# Altium PCB qav90_sharp_ref.PcbDoc (part 2 of 3)
Units mm, origin at the board's own origin, x right, y up, seen from the top; angles counter-clockwise.
Board outline 125.43 x 101.14 mm, 3 copper layers (Top Layer, Mid-Layer 1, Bottom Layer); 90 components, 77 nets, 313 pads, 238 vias.
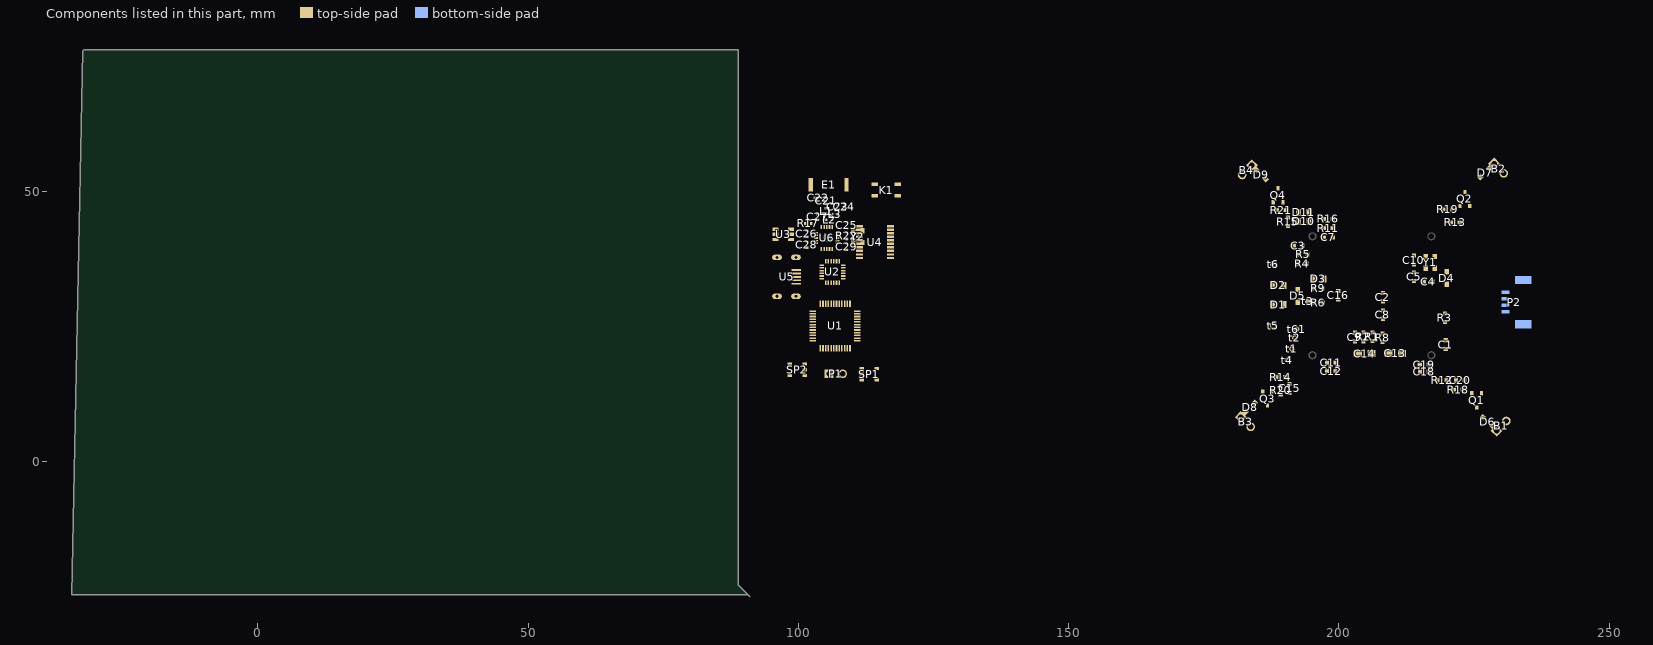
[diagram p2: the components of this part, seen from the top]

## Via types
v1: diameter 0.55, hole 0.25, Top Layer to Bottom Layer, tented both sides, 216 vias
v2: diameter 1.2, hole 1, Top Layer to Bottom Layer, 13 vias
v3: diameter 0.55, hole 0.25, Top Layer to Bottom Layer, 6 vias
v4: diameter 0.6, hole 0.6, Top Layer to Bottom Layer, tented both sides, 2 vias
v5: diameter 0.605, hole 0.3, Top Layer to Bottom Layer, tented both sides, 1 vias

## Nets (pads, with @x,y where several pads share a name; then routed paths per layer and width w, separated by ;. In a path a pad name is that pad's centre, name@x,y a point inside that pad or via, vN(x,y) a via of type N, cw(c..) or ccw(c..) an arc to the next point about the centre after c; other vN are vias at no path point) (continued)
copper on no net: | length 1779.4
  Top Layer w0.178: 111.377,38.067 ccw(c111.029,38.422) 111.526,38.422 ; 111.526,37.914 111.526,38.422 ; 111.676,38.067 cw(c112.024,38.422) 111.526,38.422 ; 112.335,37.969 ccw(c111.956,38.348) 112.492,38.348 ; 112.492,38.226 ccw(c112.854,38.226) 112.598,37.969 ; 112.86,42.931 112.86,39.756 111.526,38.422 ; 191.575,15.948 192.802,15.948 193.15,16.296 193.15,18.201 193.632,18.683 195.766,18.683 196.604,19.522 196.604,20.233 196.795,20.423 198.7,20.423 199.398,21.122 199.398,22.849 ; 191.824,15.799 cw(c192.184,15.439) 192.184,15.948 cw(c192.184,16.458) 191.824,16.098 ; v1(197.849,22.519) 198.382,22.519 198.712,22.849 199.398,22.849 ; v1@197.98,22.387 cw(c198.298,22.069) 198.298,22.519 cw(c198.298,22.968) v1@197.98,22.65 ; v1(198.306,23.332) 198.179,23.332 198.361,23.514 200.516,23.514 ; v1@198.312,23.326 cw(c198.766,22.871) 198.766,23.514 ; v1@198.437,23.2 cw(c199.195,22.442) 199.195,23.514 ; 199.962,22.785 ccw(c199.772,22.596) 199.772,22.864 ccw(c199.772,23.132) 199.962,22.943 ; 199.962,23.435 ccw(c199.772,23.246) 199.772,23.514 ccw(c199.772,23.782) 199.962,23.593 ; 200.516,22.864 199.561,22.864 199.546,22.849 199.398,22.849 ; v1@211.692,34.025 211.692,35.041 212.39,35.739 212.39,38.965 213.343,39.918 218.36,39.918 219.592,38.686 219.592,37.809 v1(219.997,37.403) 219.997,35.256 219.87,35.129 ; 212.06,39.118 213.19,40.248 218.497,40.248 219.922,38.823 219.924,38.823 220.632,38.114 220.632,35.334 220.937,35.03 220.937,32.958 ; 219.716,35.521 ccw(c219.037,36.2) 219.997,36.2 ; v1@219.811,37.403 ccw(c219.362,37.403) 219.68,37.721 ccw(c219.997,38.039) v1@219.997,37.589 ; 219.842,35.395 ccw(c219.466,35.771) 219.997,35.771 ; v1@219.866,37.272 cw(c219.548,36.954) 219.997,36.954 cw(c220.447,36.954) v1@220.129,37.272 ; 219.87,32.769 220.06,32.958 220.937,32.958 ; 219.997,35.955 ccw(c220.611,35.955) 220.177,35.521 ; 220.051,32.825 cw(c220.373,32.504) 220.373,32.958 ; 220.177,32.699 cw(c220.802,32.075) 220.802,32.958 ; 220.177,33.161 ccw(c220.666,33.649) 220.666,32.958 ; v1@221.187,19.923 cw(c220.869,19.606) 221.318,19.606 cw(c221.767,19.606) v1@221.45,19.923 ; v1(221.318,20.055) 221.318,19.336 221.928,18.726 ; 221.343,32.958 ccw(c221.343,33.71) 221.875,33.178 ; 221.397,19.257 cw(c220.866,18.726) 221.617,18.726 ; 221.6,32.958 cw(c221.6,32.57) 221.875,32.844 ; 221.638,19.016 ccw(c221.828,19.205) 221.828,18.937 ; 221.801,32.958 220.937,32.958
  Top Layer w0.203: 191.829,23.001 191.966,22.864 194.766,22.864 ; 191.967,23.139 ccw(c192.632,23.804) 192.632,22.864 ; 192.111,22.72 cw(c192.459,22.371) 192.459,22.864 ; 192.111,23.283 ccw(c193.122,24.295) 193.122,22.864 ; 194.221,22.794 ccw(c194.053,22.626) 194.053,22.864 ccw(c194.053,23.102) 194.221,22.934 ; 194.51,46.241 cw(c194.559,45.272) 195.245,45.958 ; 194.521,46.038 cw(c194.59,44.655) 195.569,45.634 ; 194.521,46.165 195.038,46.165 ; 194.531,45.835 cw(c194.62,44.038) 195.893,45.31 ; 194.541,45.632 cw(c194.651,43.421) 196.217,44.986 ; 194.915,46.069 cw(c195.038,46.039) 195.038,46.165 ; 194.915,46.261 ccw(c195.038,46.291) 195.038,46.165 ; 197.069,44.789 ccw(c196.592,44.312) 196.592,44.986 ccw(c196.592,45.661) 197.069,45.184 ; 197.267,44.986 196.217,44.986 ; 213.655,30.792 213.655,32.468 213.19,32.933 213.19,34.025 213.444,34.279 214.308,34.279 214.714,34.685 214.714,36.311 214.461,36.564 ; 213.707,33.272 cw(c212.627,32.191) 214.155,32.191 ; 213.851,33.415 cw(c213.117,32.682) 214.155,32.682 ; 213.882,36.564 214.461,36.564 ; 213.905,33.545 ccw(c213.905,34.412) 214.517,33.799 ; 213.905,33.749 ccw(c213.905,35.106) 214.864,34.146 ; 213.994,33.559 cw(c213.608,33.172) 214.155,33.172 ; 214.101,36.39 cw(c214.461,36.103) 214.461,36.564 ; 214.101,36.738 ccw(c214.461,37.025) 214.461,36.564 ; 214.155,30.792 214.155,33.092 213.905,33.342 214.06,33.342 215.121,34.402 215.121,36.627 215.905,37.411 215.905,37.742 ; 214.655,30.792 214.655,32.649 215.347,33.342 215.705,33.342 216.483,34.12 217.126,34.12 217.705,34.699 217.705,35.342 ; 215.705,33.622 ccw(c215.705,34.296) 216.182,33.819 ccw(c216.659,33.342) 215.984,33.342 ; 215.831,37.711 cw(c215.652,37.532) 215.905,37.532 ; 215.905,37.393 cw(c216.145,37.393) 216.099,37.629 ; 217.531,35.511 cw(c217.11,35.091) 217.705,35.091 ; 217.705,34.912 cw(c218.551,34.912) 217.953,35.511 ; 195.038,46.165 196.217,44.986
  Top Layer w0.25: 101.341,46.296 v1(102.382,45.255) ; v1@102.232,45.255 ccw(c101.87,45.255) 102.126,45.511 ccw(c102.382,45.767) v1@102.382,45.405 ; 187.481,29.519 ccw(c186.827,30.173) 187.752,30.173 ccw(c188.677,30.173) 188.023,29.519 ; 187.481,32.254 cw(c186.827,31.601) 187.752,31.601 cw(c188.677,31.601) 188.023,32.254 ; 187.741,32.663 ccw(c187.806,33.345) 188.291,32.86 ; 187.752,29.122 187.752,32.652 188.082,32.652 189.042,33.611 ; 187.765,32.912 ccw(c187.871,34.031) 188.666,33.236 ; 187.788,33.16 ccw(c187.936,34.717) 189.042,33.611 ; 189.481,29.519 ccw(c188.827,30.173) 189.752,30.173 ccw(c190.677,30.173) 190.023,29.519 ; 189.752,29.122 189.752,30.729 190.178,31.155 191.778,31.155 191.807,31.126 193.374,31.126 193.992,31.743 193.992,33.161 194.281,33.451 194.281,34.496 194.646,34.861 196.745,34.861 197.408,35.524 198.458,35.524 198.865,35.93 198.865,38.876 198.582,39.159 197.986,39.159 ; 189.752,32.652 189.782,32.652 190.742,33.611 193.592,33.611 193.879,33.899 193.879,34.674 194.517,35.311 196.626,35.311 ; 190.051,15.43 cw(c190.051,14.812) 190.488,15.249 cw(c190.925,15.686) 190.307,15.686 ; 190.051,15.686 190.559,15.178 195.385,15.178 196.071,15.864 198.055,15.864 198.28,16.089 200.233,16.089 200.49,16.347 201.633,16.347 202.294,17.007 202.294,17.845 202.985,18.536 204.035,18.536 204.792,19.293 204.792,20.861 205.306,21.376 209.431,21.376 v1(209.792,21.736) ; 190.567,43.661 191.367,43.661 191.426,43.602 194.825,43.602 195.944,42.483 200.541,42.483 ; 190.748,43.48 cw(c191.185,43.043) 191.185,43.661 cw(c191.185,44.279) 190.748,43.842 ; 191.722,35.592 ccw(c190.642,36.673) 192.17,36.673 ; 192.149,36.019 ccw(c191.495,36.673) 192.42,36.673 ; 192.567,36.411 192.542,36.411 190.767,34.636 190.767,34.236 190.142,33.611 189.042,33.611 ; 194.521,44.514 194.539,44.514 195.792,43.261 197.267,43.261 ; 196.864,36.077 cw(c196.018,35.92) 196.626,35.311 ; 196.92,35.978 cw(c196.693,35.721) 197.036,35.721 ; 196.962,35.647 ccw(c196.584,36.025) 197.11,36.122 ; 197.036,36.359 197.036,35.721 ; 197.086,43.08 ccw(c196.649,42.643) 196.649,43.261 ccw(c196.649,43.879) 197.086,43.442 ; 197.152,35.978 ccw(c197.378,35.721) 197.036,35.721 ; 198.11,39.035 cw(c198.408,38.736) 198.408,39.159 cw(c198.408,39.581) 198.11,39.283 ; v1@209.642,21.736 cw(c209.279,21.736) 209.536,21.48 cw(c209.792,21.224) v1@209.792,21.586 ; v1(214.292,24.861) 214.292,24.686 214.655,24.323 ; v1@214.442,24.857 ccw(c215.169,24.838) 214.655,24.323 ; 214.655,22.592 214.655,24.323 ; v1@214.967,26.611 cw(c214.967,26.249) 215.223,26.505 cw(c215.479,26.761) v1@215.117,26.761 ; v1(214.967,26.761) 215.286,26.442 218.005,26.442 ; v1@214.967,28.211 cw(c214.967,27.729) 215.308,28.07 ; v1(214.967,28.361) 215.017,28.361 216.436,26.942 218.005,26.942 ; v1@215.117,28.361 ccw(c215.358,28.361) 215.187,28.191 ; v1(217.892,44.261) 220.692,44.261 220.742,44.311 ; v1@217.998,44.155 cw(c218.254,43.899) 218.254,44.261 cw(c218.254,44.624) v1@217.998,44.367 ; 220.003,44.261 ccw(c220.003,45.05) 220.561,44.492 ; 220.244,44.261 cw(c220.244,43.814) 220.561,44.13 ; 196.626,35.311 197.036,35.721
  Top Layer w0.254: 99.742,46.999 v1(101.767,46.999) ; 99.846,45.17 cw(c100.28,44.736) 100.28,45.349 cw(c100.28,45.962) 99.846,45.529 ; 99.846,46.895 cw(c100.099,46.642) 100.099,46.999 ; 99.846,47.254 ccw(c100.461,47.868) 100.461,46.999 ; 99.846,48.62 cw(c100.159,48.307) 100.159,48.749 ; 99.846,48.979 ccw(c100.401,49.533) 100.401,48.749 ; 100.427,41.216 100.452,41.241 ; 100.891,45.349 101.257,44.983 101.257,44.137 101.257,43.103 101.595,42.765 101.646,42.765 102.473,41.938 103.262,41.938 ; 101.17,44.05 cw(c100.96,43.84) 101.257,43.84 cw(c101.554,43.84) 101.344,44.05 ; 101.17,44.224 ccw(c100.96,44.434) 101.257,44.434 ccw(c101.554,44.434) 101.344,44.224 ; 101.257,43.265 ccw(c102.095,43.265) 101.502,42.673 ; 101.257,43.878 ccw(c102.708,43.878) 101.682,42.852 ; 101.472,42.765 ccw(c101.175,42.765) 101.385,42.975 ccw(c101.595,43.185) 101.595,42.888 ; 101.502,41.573 ccw(c101.828,41.898) 101.828,41.438 ; 101.508,39.58 cw(c101.298,39.37) 101.595,39.37 cw(c101.892,39.37) 101.682,39.58 cw(c101.892,39.37) 101.892,39.667 cw(c101.892,39.964) 101.682,39.754 ; 101.595,39.667 102.052,39.667 102.824,40.438 103.262,40.438 ; 101.595,40.767 101.766,40.938 103.262,40.938 ; 101.595,41.665 101.822,41.438 103.262,41.438 104.052,41.438 ; 101.595,42.642 cw(c101.595,42.223) 101.892,42.52 ; v1@101.637,48.645 ccw(c101.384,48.392) 101.384,48.749 ccw(c101.384,49.107) v1@101.637,48.854 ; v1@101.662,46.895 ccw(c101.409,46.642) 101.409,46.999 ccw(c101.409,47.356) v1@101.662,47.104 ; 101.682,40.68 cw(c102.306,40.056) 102.306,40.938 ; 101.682,41.752 ccw(c102.441,42.511) 102.441,41.438 ; 102.357,44.137 102.357,43.985 103.144,43.197 103.144,42.556 103.262,42.438 ; 102.48,44.137 ccw(c103.145,44.137) 102.675,43.667 ; v1@102.532,46.223 ccw(c102.095,46.659) 102.713,46.659 ; v1(102.56,47.896) 102.662,47.998 103.094,47.998 ; v1@102.608,46.928 cw(c102.355,46.675) 102.713,46.675 cw(c103.07,46.675) v1@102.817,46.928 ; 102.633,40.248 cw(c103.037,39.844) 103.037,40.415 ; v1(102.636,46.118) 102.713,46.194 v1(102.713,47.033) ; v1@102.674,47.801 cw(c103.094,47.451) 103.094,47.998 ; 103.007,48.8 cw(c102.797,48.59) 103.094,48.59 cw(c103.391,48.59) 103.181,48.8 ; 103.021,42.454 ccw(c102.722,42.753) 103.144,42.753 ; 103.094,48.887 103.094,47.998 ; 103.144,38.016 103.144,39.006 103.551,39.413 104.237,39.413 104.262,39.438 ; 103.144,38.491 ccw(c103.849,38.491) 103.351,37.993 ; 103.461,44.7 103.551,44.79 103.551,44.149 104.262,43.438 104.262,41.648 104.052,41.438 ; 103.464,44.703 cw(c103.254,44.493) 103.551,44.493 cw(c103.848,44.493) 103.638,44.703 ; 103.464,45.977 ccw(c103.254,46.187) 103.551,46.187 ccw(c103.848,46.187) 103.638,45.977 ccw(c103.848,46.187) 103.848,45.89 ccw(c103.848,45.593) 103.638,45.803 ; 103.627,50.405 cw(c103.627,49.84) 104.026,50.24 ; 103.627,51.528 103.627,50.639 104.194,50.073 104.194,48.887 ; 103.839,43.861 ccw(c104.262,44.285) 104.262,43.686 ; 103.9,50.678 ccw(c104.653,50.678) 104.121,50.146 ; 103.957,38.087 ccw(c103.957,38.629) 104.34,38.246 ; v1@104.038,46.829 ccw(c103.681,46.829) 103.933,47.082 ccw(c104.186,47.335) v1@104.186,46.977 ; 104.107,48.974 ccw(c103.897,49.184) 104.194,49.184 ccw(c104.491,49.184) 104.281,48.974 ccw(c104.472,49.165) 104.472,48.895 ; v1(104.186,46.829) 103.551,47.464 ; 104.201,48.895 105.126,48.895 ; 104.281,48.8 cw(c104.509,48.571) 104.509,48.895 ; 104.691,43.889 ccw(c104.988,43.889) 104.778,43.679 ; 104.762,38.668 104.762,39.438 ; 104.762,43.438 104.691,43.509 104.691,44.038 104.287,44.442 104.287,45.585 103.983,45.89 103.551,45.89 103.551,47.464 ; 105.031,44.71 cw(c104.863,44.543) 105.1,44.543 ; 105.031,44.884 ccw(c104.821,45.094) 105.118,45.094 ccw(c105.415,45.094) 105.205,44.884 ; 105.039,45.752 cw(c104.847,45.561) 105.118,45.561 ; 105.039,47.026 ccw(c104.829,47.236) 105.126,47.236 ccw(c105.423,47.236) 105.213,47.026 ; 105.039,47.708 cw(c104.829,47.498) 105.126,47.498 cw(c105.423,47.498) 105.213,47.708 ; 105.039,48.808 ccw(c104.829,48.598) 104.829,48.895 ccw(c104.829,49.192) 105.039,48.982 ; 105.1,44.458 cw(c105.457,44.458) 105.205,44.71 ; 105.118,45.523 cw(c105.441,45.523) 105.213,45.752 ; 105.126,45.839 105.118,45.831 105.118,44.797 105.1,44.78 105.1,44.213 105.262,44.051 105.262,43.438 ; 105.126,46.939 105.126,47.795 ; v1@105.199,38.476 ccw(c105.007,38.667) 105.278,38.667 ; 105.262,39.438 105.278,39.422 v1@105.278,38.32 ; 105.278,38.79 ccw(c105.722,38.79) v1@105.408,38.476 ; 105.762,39.438 105.762,38.827 v1@106.116,38.473 ; 105.762,43.438 105.762,44.189 106.218,44.645 106.218,44.797 106.218,45.831 106.21,45.839 ; 105.81,38.779 cw(c105.427,38.397) v1@105.968,38.397 ; 105.9,44.327 ccw(c105.43,44.797) 106.095,44.797 ; 106.123,45.752 cw(c105.894,45.523) 106.218,45.523 ; 106.131,44.884 ccw(c105.921,45.094) 106.218,45.094 ccw(c106.515,45.094) 106.305,44.884 ; 106.218,45.561 cw(c106.488,45.561) 106.297,45.752 ; 106.262,39.438 106.777,39.438 107.056,39.159 v1(107.056,38.574) ; 106.262,43.438 106.916,43.438 107.31,43.832 107.31,45.839 107.31,46.644 108.224,46.644 ; v1@106.951,38.679 ccw(c106.699,38.932) 107.056,38.932 ccw(c107.413,38.932) v1@107.161,38.679 ; 107.223,45.752 cw(c107.013,45.542) 107.31,45.542 cw(c107.607,45.542) 107.397,45.752 ; 107.223,45.926 ccw(c107.013,46.136) 107.31,46.136 ccw(c107.607,46.136) 107.397,45.926 ; 107.223,46.557 cw(c107.013,46.347) 107.31,46.347 cw(c107.607,46.347) 107.397,46.557 cw(c107.607,46.347) 107.607,46.644 cw(c107.607,46.941) 107.397,46.731 ; 107.262,40.438 107.262,39.689 108.047,38.905 v1(108.047,38.701) ; 107.262,40.938 106.676,40.938 106.065,40.327 104.694,40.327 104.052,40.969 104.052,41.438 ; 107.262,41.438 108.053,41.438 108.275,41.216 108.275,39.921 108.936,39.26 ; 107.262,41.938 108.261,41.938 108.936,41.263 ; 107.262,42.438 108.861,42.438 108.936,42.363 ; 107.31,47.744 108.961,47.744 ; 107.397,47.657 cw(c107.607,47.447) 107.607,47.744 cw(c107.607,48.041) 107.397,47.831 ; 107.65,39.301 cw(c107.051,38.701) v1@107.899,38.701 ; 108.382,46.568 ccw(c108.224,46.443) 108.224,46.644 ; 108.382,46.72 cw(c108.224,46.845) 108.224,46.644 ; 108.391,46.557 ccw(c108.181,46.347) 108.181,46.644 ccw(c108.181,46.941) 108.391,46.731 ; 108.391,47.657 ccw(c108.181,47.447) 108.181,47.744 ccw(c108.181,48.041) 108.391,47.831 ; 108.457,42.438 cw(c108.457,41.885) 108.849,42.276 ; 108.565,47.657 cw(c108.775,47.447) 108.775,47.744 cw(c108.775,48.041) 108.565,47.831 ; 108.813,39.26 ccw(c108.516,39.26) 108.726,39.47 ccw(c108.936,39.68) 108.936,39.383 ; 108.813,41.263 ccw(c108.516,41.263) 108.726,41.473 ccw(c108.936,41.683) 108.936,41.386 ccw(c108.936,42.409) 109.659,41.686 ; 108.849,39.173 cw(c108.639,38.963) 108.936,38.963 cw(c109.233,38.963) 109.023,39.173 ; 108.849,40.447 ccw(c108.639,40.657) 108.936,40.657 ccw(c109.233,40.657) 109.023,40.447 ; 108.849,41.176 cw(c108.639,40.966) 108.936,40.966 cw(c109.233,40.966) 109.023,41.176 cw(c109.233,40.966) 109.233,41.263 cw(c109.233,41.56) 109.023,41.35 ; 108.849,42.45 ccw(c108.639,42.66) 108.936,42.66 ccw(c109.233,42.66) 109.023,42.45 ccw(c109.233,42.66) 109.233,42.363 ccw(c109.233,42.066) 109.023,42.276 ; 108.849,43.179 cw(c108.639,42.969) 108.936,42.969 cw(c109.233,42.969) 109.023,43.179 ; 108.849,44.453 ccw(c108.516,44.785) 108.986,44.785 ; v1@108.882,45.175 cw(c108.629,44.923) 108.986,44.923 cw(c109.344,44.923) v1@109.091,45.175 ; v1@108.882,45.385 ccw(c107.955,46.312) 109.266,46.312 ; 108.936,40.36 108.936,41.263 ; 108.936,41.132 ccw(c108.936,41.542) 109.226,41.252 ; 108.936,43.266 108.936,42.363 ; v1@108.986,45.428 ccw(c108.986,45.785) 109.239,45.533 ccw(c109.492,45.28) v1@109.134,45.28 ; 109.023,44.279 cw(c109.233,44.069) 109.233,44.366 cw(c109.233,44.663) 109.023,44.453 ; v1@109.061,45.205 ccw(c108.568,45.699) 109.266,45.699 ; v1@109.073,47.303 ccw(c108.646,47.429) 108.961,47.744 ; v1@109.11,47.157 cw(c108.735,46.781) 109.266,46.781 ; 109.446,42.363 ccw(c109.446,43.241) 110.146,42.711 ; 109.766,42.405 ccw(c109.471,42.7) 109.888,42.7 ; 109.944,42.865 cw(c108.936,43.626) 108.936,42.363 ; 110.071,42.442 ccw(c109.961,42.126) 109.724,42.363 ; 110.161,42.8 109.724,42.363 ; 111.12,44.924 110.561,44.366 108.936,44.366 108.986,44.416 v1(108.986,45.28) 109.266,45.559 109.266,47.439 108.961,47.744 ; 111.679,40.903 ccw(c111.31,41.313) 111.861,41.313 ; 111.861,40.6 111.861,41.313 ; 112.044,40.903 cw(c112.413,41.313) 111.861,41.313 ; v1(188.324,31.053) 188.324,31.079 188.451,30.952 189.035,30.952 189.642,31.559 190.531,31.559 ; v1@188.428,31.158 ccw(c188.926,31.656) 188.926,30.952 ; 190.011,31.559 ccw(c190.011,32.617) v1@190.759,31.869 ; v1@190.378,30.441 cw(c189.862,29.925) 190.592,29.925 ; v1(190.483,30.545) 190.592,30.436 190.592,28.767 190.675,28.684 190.675,28.672 191.015,28.333 192.817,28.333 ; 190.624,31.559 ccw(c190.624,32.004) v1@190.939,31.689 ; v1@190.815,31.625 ccw(c190.726,31.365) 190.531,31.559 ; v1(190.864,31.764) 190.737,31.764 190.531,31.559 ; v1(191.219,29.656) 192.224,29.656 192.337,29.543 ; 191.295,20.944 192.565,22.214 194.766,22.214 ; 191.295,21.317 ccw(c191.295,22.217) 191.932,21.581 ccw(c192.569,20.944) 191.668,20.944 ; v1@191.324,29.552 cw(c191.577,29.299) 191.577,29.656 cw(c191.577,30.013) v1@191.324,29.761 ; 191.573,29.656 cw(c191.573,28.865) 192.133,29.424 ; 191.71,29.656 ccw(c191.71,30.255) 192.133,29.832 ; 192.168,28.333 ccw(c192.168,29.393) v1@192.918,28.643 ; 192.184,24.576 193.247,23.514 194.766,23.514 ; v1@192.616,21.274 193.099,20.792 ; 192.782,28.333 ccw(c192.782,28.779) v1@193.098,28.464 ; v1@192.876,28.516 cw(c192.667,28.483) 192.817,28.333 ; v1@192.891,21.298 ccw(c193.6,21.293) 193.099,20.792 ; v1@193,28.392 ccw(c192.967,28.183) 192.817,28.333 ; v1(193.023,28.539) 192.817,28.333 ; v1@193.299,24.675 cw(c193.046,24.422) 193.404,24.422 cw(c193.761,24.422) v1@193.508,24.675 ; v1@193.307,24.823 ccw(c193.632,24.675) 193.379,24.423 ; v1@193.366,26.395 ccw(c193.48,26.812) 193.785,26.507 ; v1(193.404,24.779) 193.404,24.398 193.638,24.164 ; v1@193.454,26.176 193.785,26.507 ; v1@193.538,24.718 ccw(c193.987,24.513) 193.638,24.164 ; 193.987,29.413 cw(c193.622,28.944) 194.216,28.944 ; 194.167,38.411 195.367,38.411 195.842,37.936 197.569,37.936 197.986,37.52 197.986,36.359 ; v1(194.216,21.401) 197.95,21.401 198.712,22.163 v1@198.738,22.163 ; 194.216,29.707 194.216,28.944 ; 194.312,29.778 ccw(c194.906,30.218) 194.906,29.478 ; v1@194.321,21.297 cw(c194.574,21.044) 194.574,21.401 cw(c194.574,21.758) v1@194.321,21.506 ; 194.346,38.232 cw(c194.78,37.798) 194.78,38.411 cw(c194.78,39.025) 194.346,38.591 ; 194.446,29.413 ccw(c194.811,28.944) 194.216,28.944 ; 194.47,29.707 194.699,29.478 195.41,29.478 cw(c195.41,30.591) 194.516,29.929 ; 194.589,29.707 ccw(c194.877,29.707) 194.674,29.504 ; 194.766,24.164 193.638,24.164 ; 194.766,26.114 197.583,26.114 198.382,26.913 198.382,29.462 198.606,29.687 198.606,31.362 197.874,32.095 196.959,32.095 ; 194.766,26.764 196.074,26.764 196.274,26.964 v1@197.417,26.964 ; 194.766,27.414 194.784,27.396 196.02,27.396 196.282,27.658 197.653,27.658 v1(197.722,27.726) ; 194.766,28.064 196.79,28.064 197.976,29.25 v1(197.976,29.961) ; 194.944,33.476 cw(c194.294,32.826) 195.214,32.826 cw(c196.133,32.826) 195.483,33.476 ; 195.185,29.362 ccw(c194.718,29.12) 194.854,29.627 ccw(c194.99,30.135) 195.273,29.692 ; 195.214,33.06 ccw(c196.325,33.06) 195.539,32.274 ; 195.214,33.873 195.214,32.24 195.359,32.095 ; 195.231,29.299 ccw(c194.797,28.865) 194.797,29.478 ccw(c194.797,30.092) 195.231,29.658 ; 195.292,27.466 ccw(c195.461,27.635) 195.461,27.396 ; 196.82,26.964 ccw(c196.82,27.408) v1@197.134,27.094 ; 196.831,29.658 ccw(c195.783,30.705) v1@197.264,30.705 ; 196.943,26.964 cw(c196.943,26.693) v1@197.134,26.885 ; v1@197.136,30.903 cw(c196.619,30.604) 197.196,30.45 ; 197.139,31.915 cw(c197.573,31.481) 197.573,32.095 cw(c197.573,32.708) 197.139,32.274 ; v1@197.16,30.872 cw(c196.907,30.62) 197.264,30.62 cw(c197.622,30.62) v1@197.369,30.872 ; 197.2,27.658 ccw(c197.2,28.248) v1@197.617,27.83 ; 197.264,30.092 cw(c196.397,30.092) 197.01,29.478 197.264,29.733 v1(197.264,30.977) ; 197.863,36.731 ccw(c197.568,37.026) 197.986,37.026 ccw(c198.403,37.026) 198.108,36.731 ; v1@197.871,29.856 cw(c197.618,29.604) 197.976,29.604 cw(c198.333,29.604) v1@198.08,29.856 ; 198.373,21.824 cw(c198.712,21.484) v1@198.712,21.964 ; v1(198.585,24.144) 200.496,24.144 200.516,24.164 ; v1@198.615,21.35 cw(c198.258,21.35) 198.51,21.098 cw(c198.763,20.845) v1@198.763,21.202 ; v1@198.69,24.04 cw(c198.943,23.787) 198.943,24.144 cw(c198.943,24.502) v1@198.69,24.249 ; v1(198.763,21.35) 198.204,20.792 193.099,20.792 ; v1@198.866,25.972 cw(c199.209,25.629) 199.209,26.114 ; 198.867,41.536 200.091,41.536 ; 198.867,43.261 198.942,43.186 ; 198.867,44.986 198.917,44.936 200.942,44.936 ; v1@198.89,28.742 199.881,29.732 199.881,30.037 cw(c199.144,30.037) 199.665,29.517 ; v1(198.941,25.897) 199.158,26.114 ; v1@198.953,28.961 ccw(c198.794,29.554) 199.326,29.247 ; v1@198.958,26.044 ccw(c198.985,26.287) 199.158,26.114 ; v1@198.989,28.966 ccw(c198.985,29.275) 199.253,29.121 ; v1@198.992,28.966 ccw(c198.992,29.262) 199.201,29.053 ; v1@199.045,25.792 cw(c199.822,25.016) 199.822,26.114 ; v1@199.088,25.914 cw(c199.33,25.941) 199.158,26.114 ; v1@199.14,28.818 cw(c199.558,28.818) 199.262,29.114 ; 199.231,29.083 ccw(c198.277,30.037) 199.627,30.037 ; v1@199.246,27.414 200.516,27.414 ; v1@199.35,27.316 cw(c199.586,27.081) 199.586,27.414 ; v1@199.35,27.526 ccw(c199.62,27.795) 199.62,27.414 ; 199.817,24.144 ccw(c199.817,24.388) 199.989,24.216 ; v1@200.056,28.786 ccw(c200.477,28.708) 200.174,28.405 ; v1@200.057,28.66 cw(c199.826,28.42) 200.16,28.42 ; v1(200.16,28.767) 200.16,28.42 ; v1@200.263,28.66 ccw(c200.494,28.42) 200.16,28.42 ; v1@200.306,28.74 ccw(c201.053,28.602) 200.516,28.064 200.16,28.42 ; 200.516,26.114 199.158,26.114 ; 200.795,35.854 200.795,33.161 v1(202.09,31.866) 202.09,31.663 202.505,31.249 202.505,29.742 206.505,29.742 208.055,29.742 208.142,29.655 208.142,28.055 ; v1@201.942,31.866 ccw(c201.585,31.866) 201.838,32.119 ccw(c202.09,32.371) v1@202.09,32.014 ; v1@202.238,31.866 ccw(c203.086,31.866) 202.487,31.266 ; 202.7,23.916 cw(c203.314,23.916) 202.88,24.35 ; 202.7,23.928 202.7,24.169 204.196,25.666 204.571,25.666 204.755,25.849 204.755,26.492 ; v1@202.942,31.488 cw(c202.942,31.131) 203.194,31.384 cw(c203.447,31.636) v1@203.09,31.636 ; v1(202.942,31.636) 203.255,31.323 203.255,30.492 ; 202.954,23.916 cw(c204.181,23.916) 203.313,24.783 ; v1(203.157,34.127) 203.233,34.127 203.962,34.855 ; 203.208,23.916 cw(c205.048,23.916) 203.747,25.217 ; 203.708,29.742 cw(c203.708,28.658) v1@204.475,29.425 ; 203.755,26.492 203.767,26.504 203.767,27.675 204.224,28.132 204.986,28.132 205.876,27.242 206.505,27.242 207.705,27.242 ; 203.755,30.492 203.755,31.599 v1(203.792,31.636) ; 203.755,31.19 cw(c204.238,31.19) v1@203.896,31.532 ; 204.255,26.492 204.255,27.147 ; 204.321,29.742 cw(c204.321,29.271) v1@204.655,29.604 ; 204.343,24.108 ccw(c203.909,24.542) 204.522,24.542 ccw(c205.135,24.542) 204.702,24.108 ; v1@204.358,27.493 cw(c203.985,27.416) 204.255,27.147 ; v1@204.39,22.546 ccw(c204.249,22.779) v1(204.522,22.779) ; v1@204.417,22.675 cw(c204.165,22.422) 204.522,22.422 cw(c204.879,22.422) v1@204.627,22.675 ; v1@204.437,25.007 cw(c204.231,24.801) 204.522,24.801 ; v1@204.503,27.375 cw(c204.503,26.404) 205.19,27.09 ; v1@204.505,29.604 cw(c204.838,29.271) 204.838,29.742 ; 204.522,23.674 cw(c204.522,23.061) 204.956,23.495 cw(c205.389,23.928) 204.776,23.928 ; 204.522,24.707 cw(c204.946,24.707) v1@204.646,25.007 ; v1@204.522,25.111 204.522,23.928 205.314,23.136 206.696,23.136 206.916,23.357 206.916,24.449 207.409,24.942 209.805,24.942 ; v1@204.639,27.582 ccw(c204.808,27.657) 204.808,27.472 ; v1@204.654,22.546 cw(c204.796,22.779) v1(204.522,22.779) ; v1@204.664,22.739 ccw(c204.894,22.673) 204.774,22.466 ; v1@204.666,22.815 ccw(c205.457,23.014) 205.049,22.307 ; v1@204.684,29.425 cw(c205.451,28.658) 205.451,29.742 ; 204.702,22.149 cw(c205.135,21.715) 205.135,22.328 cw(c205.135,22.942) 204.702,22.508 ; v1@205.185,25.287 ccw(c205.714,25.287) 205.34,24.913 ; v1@205.194,25.176 cw(c205.008,24.962) 205.291,24.962 ; v1@205.216,25.212 ccw(c205.701,25.698) 205.701,25.011 ; 205.255,26.492 205.255,27.025 204.808,27.472 ; 205.255,30.492 205.255,31.274 205.517,31.536 207.86,31.536 208.142,31.255 ccw(c207.463,30.576) 207.463,31.536 ; v1@205.291,25.139 cw(c205.291,24.782) 205.543,25.035 cw(c205.796,25.287) 205.439,25.287 ccw(c206.581,25.287) 205.773,24.48 ; v1@205.388,25.176 ccw(c205.574,24.962) 205.291,24.962 ; v1@205.395,25.392 ccw(c206.314,26.311) 206.314,25.011 ; 205.5,22.328 ccw(c205.5,23.072) 206.026,22.546 ; 205.684,22.328 cw(c205.684,21.846) 206.026,22.187 ; 205.714,24.539 cw(c205.142,23.967) 205.951,23.967 ; 205.755,26.492 205.755,25.789 205.882,25.661 v1(206.717,25.661) ; 205.91,24.343 ccw(c206.205,24.638) 206.205,24.221 ; 206.345,23.928 206.325,23.928 205.291,24.962 ; 206.385,22.187 cw(c206.726,21.846) 206.726,22.328 ; 206.391,22.54 ccw(c206.878,22.996) 206.878,22.328 ; v1@206.612,25.557 ccw(c206.359,25.304) 206.359,25.661 ccw(c206.359,26.019) v1@206.612,25.766 ; 206.85,31.536 cw(c206.85,29.963) 207.962,31.076 ; 207.318,29.742 cw(c207.318,28.832) 207.962,29.476 cw(c207.528,29.042) 208.142,29.042 cw(c208.755,29.042) 208.321,29.476 ; 207.738,29.742 ccw(c207.738,30.058) 207.962,29.835 ; 207.897,26.521 ccw(c207.179,26.716) 207.705,27.242 ; 207.962,28.234 ccw(c207.528,28.668) 208.142,28.668 ccw(c208.755,28.668) 208.321,28.234 ; v1@208.006,32.377 ccw(c207.692,32.691) 208.136,32.691 ; 208.015,26.932 cw(c207.666,26.584) 208.142,26.455 ; 208.085,22.163 cw(c208.453,21.795) 208.453,22.316 ; 208.085,23.509 cw(c208.085,22.589) 208.735,23.24 ; v1(208.11,32.272) 208.136,32.298 208.136,35.447 ; 208.136,32.568 ccw(c208.406,32.568) v1@208.215,32.377 ; 208.186,26.761 207.705,27.242 ; 208.212,22.163 208.364,22.316 209.533,22.316 209.825,22.608 ; 208.212,23.763 208.872,23.103 209.101,23.103 v1(209.126,23.103) ; 208.264,21.984 cw(c209.066,21.182) 209.066,22.316 ; 208.339,23.763 ccw(c208.645,23.763) 208.429,23.546 ; 208.44,23.535 ccw(c209.126,24.222) v1@209.126,23.251 ; 209.805,23.942 209.159,23.942 208.872,24.229 208.872,24.26 208.658,24.475 207.628,24.475 207.348,24.195 207.348,22.798 206.878,22.328 ; 209.805,24.442 210.883,24.442 210.883,24.186 ; 209.805,25.442 207.335,25.442 206.904,25.011 205.567,25.011 v1(205.291,25.287) 205.291,24.962 ; 209.805,25.942 212.747,25.942 v1(212.842,26.036) ; 209.805,29.442 209.805,32.24 210.447,32.882 211.742,32.882 212.25,33.39 v1@212.25,34.812 ; 210.068,22.39 cw(c207.765,20.087) 211.022,20.087 ; v1@210.292,31.209 ccw(c210.039,31.461) 210.396,31.461 ccw(c210.754,31.461) v1@210.501,31.209 ; 210.32,41.112 213.749,41.112 v1(213.927,40.934) ; v1(210.396,31.104) 210.396,31.891 210.752,32.247 212.174,32.247 212.655,31.767 212.655,30.792 212.655,29.811 212.987,29.478 214.917,29.478 215.155,29.716 215.155,30.792 215.155,31.664 215.062,31.757 215.062,32.341 215.403,32.682 216.286,32.682 216.655,32.313 216.655,30.792 217.769,30.792 217.887,30.674 218.005,30.557 218.005,29.442 ; 210.502,21.956 cw(c208.632,20.087) 211.276,20.087 ; 210.883,24.547 cw(c211.746,24.547) v1@211.136,25.157 ; 210.935,21.522 cw(c209.5,20.087) 211.53,20.087 ; v1(211.031,25.262) 210.883,25.114 210.883,24.186 ; 211.3,22.2 212.463,21.037 ; v1@211.317,24.536 212.492,24.536 ; v1(211.336,28.767) 211.641,29.072 215.679,29.072 216.084,29.477 216.084,31.508 ; v1@211.336,28.915 ccw(c211.336,29.272) 211.589,29.02 ccw(c211.841,28.767) v1@211.484,28.767 ; 211.369,21.089 cw(c210.367,20.087) 211.784,20.087 ; 211.49,20.567 ccw(c211.409,20.801) 211.657,20.801 ; v1@211.542,24.446 cw(c211.76,24.228) 211.76,24.536 ; v1@211.542,24.655 ccw(c211.83,24.943) 211.83,24.536 ; 211.657,20.087 211.657,20.801 ; 211.824,20.567 cw(c211.905,20.801) 211.657,20.801 ; v1(211.867,25.311) 212.617,25.311 214.155,23.773 214.155,22.592 ; v1@211.971,25.207 cw(c212.224,24.954) 212.224,25.311 cw(c212.224,25.669) v1@211.971,25.416 ; v1@212.12,34.708 cw(c211.806,34.394) 212.25,34.394 ; 212.25,34.516 cw(c212.521,34.516) v1@212.33,34.708 ; 212.257,25.942 ccw(c212.257,26.621) v1@212.737,26.141 ; v1@212.4,32.86 ccw(c211.595,33.664) 212.733,33.664 ; v1@212.504,32.607 cw(c212.504,32.25) 212.757,32.502 cw(c213.01,32.755) v1@212.652,32.755 ; v1@212.515,32.903 ccw(c212.536,33.181) 212.733,32.984 ; v1@212.579,32.68 ccw(c212.208,33.051) 212.733,33.051 ; v1@212.652,32.766 cw(c212.93,32.786) 212.733,32.984 ; 213.14,41.112 cw(c213.14,40.147) v1@213.822,40.829 ; 213.142,35.346 ccw(c213.819,36.022) 213.905,35.069 213.419,35.069 ; 213.155,22.592 213.155,17.119 214.641,15.633 215.993,15.633 216.514,15.111 218.267,15.111 ; 213.155,30.792 213.155,32.105 v1(212.504,32.755) 212.733,32.984 ; v1@213.187,27.457 cw(c212.934,27.204) 213.292,27.204 cw(c213.649,27.204) v1@213.396,27.457 ; 213.262,37.653 cw(c213.882,37.033) 213.882,37.91 ; v1(213.292,27.561) 213.292,26.886 215.236,24.942 218.005,24.942 ; 213.526,37.916 ccw(c213.278,38.164) 213.628,38.164 ; 213.655,22.592 213.655,23.373 ; 213.725,34.89 ccw(c213.291,34.456) 213.291,35.069 ccw(c213.291,35.682) 213.725,35.249 ; 213.773,38.164 212.758,37.149 212.758,35.73 ; 213.882,35.322 cw(c213.756,36.727) 212.758,35.73 ; v1@213.962,28.257 cw(c213.709,28.004) 214.067,28.004 cw(c214.424,28.004) v1@214.171,28.257 ; v1(214.067,28.361) 214.067,26.786 215.411,25.442 218.005,25.442 217.96,25.486 ; v1@215.617,31.838 cw(c215.617,31.508) 215.85,31.742 ; v1(215.617,31.986) 215.617,31.975 216.084,31.508 ; 215.655,22.592 215.655,21.698 ; v1@215.761,21.393 ccw(c215.392,21.436) 215.655,21.698 ; v1@215.765,31.986 ccw(c216.149,31.986) 215.877,31.715 ; v1@215.943,21.41 215.655,21.698 ; 216.084,30.116 cw(c216.38,30.116) 216.171,30.326 ; 216.084,31.468 ccw(c216.38,31.468) 216.171,31.258 ; 216.133,31.251 ccw(c215.919,31.343) 216.084,31.508 ; 216.155,22.592 216.155,23.553 216.282,23.68 216.855,23.68 217.381,23.154 217.381,22.798 217.661,22.519 219.337,22.519 ; 216.655,22.592 216.655,21.747 217.534,20.868 219.718,20.868 219.769,20.919 ; 217.33,19.748 217.764,19.748 ; 217.988,23.926 cw(c217.558,23.496) 218.167,23.496 ; 218,23.92 cw(c217.955,23.713) 218.167,23.713 ; 218.005,23.942 218.167,23.78 v1@218.167,23.128 ; 218.005,27.442 219.587,27.442 219.616,27.472 ; 218.005,28.942 219.847,28.942 v1(219.967,29.061) ; v1@218.039,23.233 ccw(c217.729,23.542) 218.167,23.542 ; 218.087,14.932 ccw(c217.653,14.498) 217.653,15.111 ccw(c217.653,15.725) 218.087,15.291 ; 218.167,23.429 ccw(c218.444,23.429) v1@218.248,23.233 ; 218.932,27.442 ccw(c218.932,28.156) 219.437,27.651 ; 219.032,20.868 ccw(c219.032,21.655) 219.589,21.098 ; 219.075,27.442 cw(c219.075,26.93) 219.437,27.292 ; 219.279,20.868 cw(c219.279,20.429) 219.589,20.739 ; 219.322,28.942 ccw(c219.322,29.706) v1@219.862,29.166 ; 219.589,22.339 ccw(c219.156,21.906) 219.156,22.519 ccw(c219.156,23.132) 219.589,22.698 ; 219.769,22.519 219.337,22.519 ; 103.094,47.998 103.551,47.541 103.551,47.464 ; 108.936,41.263 109.237,41.263 109.748,41.775 111.399,41.775 111.861,41.313 ; 108.936,42.363 109.724,42.363 ; 193.785,26.507 193.785,28.512 194.216,28.944 ; 204.255,27.147 204.58,27.472 204.808,27.472 ; v1(204.522,22.779) 204.522,22.328 206.878,22.328 ; 209.825,22.608 210.889,23.672 210.889,24.18 210.883,24.186 ; 209.825,22.608 209.863,22.57 209.863,22.544 209.888,22.57 211.657,20.801 ; 212.733,32.984 212.733,34.584 213.218,35.069 213.419,35.069 ; 212.758,35.73 213.419,35.069 ; 213.419,35.069 ccw(c213.419,35.407) 213.696,35.214 cw(c213.419,35.407) 213.419,35.069 ; 213.419,35.069 cw(c213.419,34.732) 213.696,34.924 ccw(c213.419,34.732) 213.419,35.069 ; 219.337,22.519 ccw(c219.337,22.759) 219.547,22.642 cw(c219.337,22.759) 219.337,22.519 ; 219.337,22.519 cw(c219.337,22.279) 219.547,22.395 ccw(c219.337,22.279) 219.337,22.519
  Top Layer w0.381: 192.555,25.882 192.973,25.464 194.766,25.464 ; 194.766,24.814 200.516,24.814 201.548,24.814 201.702,24.66
  Top Layer w0.5: 99.931,38.778 100.427,39.274 ; 100.427,41.216 100.427,39.274 ; 100.452,39.248 100.427,39.274 ; 100.452,41.241 100.876,41.665 101.595,41.665 ; 194.475,17.998 cw(c194.475,17.4) 194.898,17.823 ; 196.706,16.702 196.019,16.702 ; 197.017,16.637 ccw(c197.017,17.61) 197.705,16.922 ; 197.04,34.19 ccw(c196.681,34.584) 197.214,34.584 ; 197.214,33.873 197.214,34.584 ; 197.387,34.19 cw(c197.746,34.584) 197.214,34.584 ; 197.447,34.11 cw(c198.127,34.433) 197.595,34.965 ; 197.798,16.96 ccw(c197.798,17.46) 198.152,17.107 ; 199.131,34.965 197.595,34.965 ; 199.652,35.435 199.652,33.339 201.702,31.289 201.702,24.66 201.862,24.5 201.862,21.427 200.871,20.436 200.871,19.064 200.16,18.353 199.398,18.353 197.874,16.829 197.798,16.829 197.605,16.637 196.084,16.637 196.019,16.702 ; 196.019,16.702 194.672,18.048 194.375,18.048 195.721,16.702 196.019,16.702 ; 197.214,34.584 197.595,34.965 ; 195.16,17.263 ccw(c196.198,18.3) 196.198,16.833 cw(c196.198,18.3) 195.16,17.263
  Top Layer w0.508: 99.868,44.035 101.155,44.035 101.257,44.137 ; v1(100.325,42.461) 101.29,42.461 ; 100.869,42.461 ccw(c100.869,43.492) 101.598,42.763 ; 101.021,44.035 ccw(c101.021,44.373) 101.26,44.134 ; 101.595,42.765 101.29,42.461 ; 101.599,42.765 cw(c101.29,42.769) 101.29,42.461 ; 185.868,12.903 cw(c185.581,12.332) 186.22,12.332 ; 185.885,12.899 cw(c185.861,12.54) 186.22,12.54 ; 185.889,13.045 186.22,12.713 186.22,12.43 187.003,11.648 190.178,11.648 190.864,12.333 190.864,12.816 ; 187.689,12.899 cw(c187.689,12.239) 188.155,12.706 ; 187.689,13.045 187.689,14.924 188.451,15.686 ; 187.841,48.02 189.035,49.214 190.635,49.214 190.991,48.859 190.991,47.462 190.127,46.598 190.127,46.149 ; 187.867,12.994 188.274,12.586 189.138,12.586 189.238,12.486 ; 188.689,12.586 cw(c188.689,11.937) 189.148,12.396 ; 188.838,29.887 cw(c189.388,29.887) v1@188.999,30.276 ; 188.881,27.486 ccw(c188.461,27.906) 189.055,27.906 ccw(c189.648,27.906) 189.229,27.486 ; v1(188.984,30.291) 188.838,30.145 188.838,28.318 189.055,28.101 189.055,27.312 192.555,27.312 192.555,25.882 ; v1(189.34,44.744) 189.34,44.769 188.527,45.582 188.527,46.598 189.641,47.712 189.641,48.02 ; 189.415,47.486 ccw(c188.981,47.92) 189.595,47.92 ; 189.629,27.138 cw(c190.048,26.718) 190.048,27.312 cw(c190.048,27.906) 189.629,27.486 ; 190.04,13.284 ccw(c190.864,14.108) 190.864,12.943 ccw(c190.864,14.476) v1@191.948,13.392 ; 190.253,46.586 ccw(c191.336,46.478) 190.567,45.709 ; 190.283,18.687 cw(c189.863,18.267) 190.457,18.267 cw(c191.051,18.267) 190.631,18.687 ; 190.306,11.775 ccw(c189.265,12.816) 190.737,12.816 ; 190.44,45.274 ccw(c189.358,45.38) 190.127,46.149 ; 190.457,18.861 190.457,17.667 ; 190.567,45.261 190.567,45.709 ; 190.801,17.323 ccw(c191.475,17.997) 191.475,17.044 ; 190.864,14.416 191.854,14.416 v1(192.032,14.594) ; 191.392,18.136 v1(192.467,18.136) ; 191.552,14.416 ccw(c191.552,15.074) v1@192.017,14.609 ; 191.575,16.998 191.126,16.998 190.457,17.667 ; v1(191.575,38.673) 191.575,41.188 190.495,42.267 v1(190.533,42.305) 191.102,42.874 194.175,42.874 v1(194.343,43.042) ; 191.575,39.543 cw(c192.109,39.543) 191.731,39.922 ; 191.575,40.479 ccw(c192.109,40.479) 191.731,40.101 ; v1@191.59,38.688 ccw(c192.257,39.356) 192.257,38.411 ; v1@191.595,38.678 ccw(c191.928,38.753) 191.928,38.411 ; v1@191.621,38.719 191.928,38.411 ; 191.707,18.016 cw(c191.998,17.725) 191.998,18.136 ; 191.981,27.138 ccw(c191.561,26.718) 191.561,27.312 ccw(c191.561,27.906) 191.981,27.486 ; v1(192.083,13.527) 191.372,12.816 190.864,12.816 ; v1@192.195,47.421 cw(c191.409,46.635) 192.521,46.635 ; v1@192.204,47.416 cw(c192.085,46.997) 192.521,46.997 ; v1(192.21,47.436) 192.521,47.125 192.521,46.165 192.521,44.514 ; 192.288,32.141 ccw(c192.15,32.574) 192.605,32.574 ; 192.337,29.453 192.337,29.543 ; 192.341,44.821 ccw(c191.907,45.254) 192.521,45.254 ccw(c193.134,45.254) 192.7,44.821 ; 192.341,45.858 cw(c191.907,45.425) 192.521,45.425 cw(c193.134,45.425) 192.7,45.858 ; 192.341,46.472 ccw(c191.907,46.905) 192.521,46.905 ccw(c193.134,46.905) 192.7,46.472 ; 192.381,27.138 cw(c191.961,26.718) 192.555,26.718 cw(c193.149,26.718) 192.729,27.138 ; 192.488,32.044 cw(c192.961,32.218) 192.605,32.574 ; 192.498,31.988 cw(c193.656,31.988) 192.837,32.807 ; 192.567,38.411 191.928,38.411 ; 192.605,32.092 192.605,32.574 ; v1(193.068,33.013) 193.043,33.013 192.605,32.574 ; 193.152,39.922 cw(c192.603,39.373) 193.379,39.373 ; 193.242,40.011 193.379,39.874 193.379,36.299 ; v1@193.473,35.77 ccw(c193.048,35.968) 193.379,36.299 ; v1@193.492,35.95 cw(c194.09,35.95) 194.037,36.546 ; v1@193.492,35.967 cw(c194.072,35.967) 194.034,36.546 ; 193.684,36.404 cw(c194.026,36.063) 194.026,36.546 ccw(c194.026,36.123) 193.727,36.422 ; 193.828,36.523 ccw(c194.589,35.761) 193.513,35.761 cw(c194.65,35.761) 193.846,36.565 ; 193.887,42.874 ccw(c193.887,43.498) v1@194.329,43.057 ; 193.989,36.709 193.492,36.211 193.492,36.186 ; 194.002,36.697 193.492,36.186 ; 194.026,36.673 195.772,36.673 196.086,36.359 ; v1(196.68,17.591) 197.036,17.591 197.798,18.353 197.798,19.141 198.128,19.471 199.398,19.471 199.627,19.699 199.627,20.538 v1(200.185,21.096) 200.185,21.173 200.516,21.503 ; v1@196.68,17.612 ccw(c196.68,18.522) 197.323,17.879 ; 197.036,39.159 197.036,39.833 198.739,41.536 198.867,41.536 ; 197.082,39.409 cw(c198.217,39.409) 197.414,40.211 ; 197.375,40.143 cw(c197.769,39.915) v1@197.651,40.355 ; 197.38,40.152 cw(c197.752,39.937) v1@197.65,40.355 ; v1@198.247,34.211 198.331,34.127 198.331,33.187 199.881,31.637 ; 198.433,41.23 cw(c198.867,40.796) 198.867,41.409 ; 199.398,16.829 199.447,16.878 200.615,16.878 v1(201.049,17.312) 201.197,17.46 201.197,18.462 201.528,18.792 201.528,19.903 203.343,19.903 203.501,20.061 202.954,20.608 202.954,22.316 ; 199.488,16.739 cw(c199.822,16.405) 199.822,16.878 ; v1@200.171,21.111 ccw(c199.338,21.944) 200.516,21.944 ; v1@200.182,21.117 ccw(c200.126,21.503) 200.516,21.503 ; 200.516,22.163 200.516,21.503 ; v1@201.034,17.327 ccw(c200.64,17.721) 201.197,17.721 ; 202.072,19.903 ccw(c202.072,21.363) 203.105,20.33 ; 202.954,20.769 ccw(c204.082,20.769) 203.284,19.971 ; 202.954,21.995 ccw(c205.308,21.995) 203.644,20.33 ; 203.005,21.805 cw(c203.575,21.957) 203.064,22.252 ; 204.777,16.986 206.321,18.531 211.632,18.531 211.657,18.506 ; 204.777,17.532 ccw(c204.777,18.851) 205.709,17.918 ccw(c206.641,16.986) 205.323,16.986 ; v1(207.069,26.329) 207.755,26.329 ; 207.531,26.329 ccw(c207.531,27.066) 208.052,26.545 ; 208.025,26.506 cw(c207.755,26.624) 207.755,26.329 ; 208.186,26.761 207.755,26.329 ; 211.388,19.817 cw(c210.737,19.167) 211.657,19.167 cw(c212.577,19.167) 211.926,19.817 ; 211.657,17.408 ccw(c212.346,17.408) v1@211.859,16.92 ; 211.657,20.087 211.657,18.506 ; v1(211.844,16.905) 211.657,17.092 211.657,18.506 ; 213.773,38.164 213.927,38.318 v1(213.927,39.384) ; 213.792,38.254 ccw(c213.467,38.578) 213.927,38.578 ; v1(213.819,17.255) 214.587,18.023 214.943,18.023 ; v1(213.927,40.934) v1(213.927,41.924) ; 214.119,17.555 cw(c214.943,16.73) 214.943,17.896 ; 214.853,17.933 cw(c214.453,17.533) 215.019,17.533 ; 215.019,16.702 215.019,17.947 214.943,18.023 ; 215.485,41.924 cw(c215.485,40.126) 216.757,41.398 ; v1(215.552,20.436) 214.943,19.827 214.943,18.023 ; 216.335,41.924 ccw(c216.335,42.521) 216.757,42.099 ; 216.453,17.933 cw(c216.031,17.511) 216.628,17.511 ; 216.543,18.023 216.628,17.938 216.628,16.711 217.991,16.711 ; 216.984,45.734 cw(c216.984,45.337) v1@217.265,45.618 ; v1@217.294,45.618 cw(c217.576,45.337) 217.576,45.734 ; 217.305,33.342 217.968,33.342 219.049,34.423 219.049,35.933 219.185,36.068 v1(219.185,37.225) ; 217.33,19.748 217.82,19.259 ; 217.357,19.319 cw(c217.549,18.988) 217.82,19.259 ; 217.458,41.398 cw(c218.73,40.126) 218.73,41.924 ; 217.458,42.099 ccw(c217.88,42.521) 217.88,41.924 ; 217.598,19.823 ccw(c218.253,19.922) 218.253,19.259 ; 217.604,19.748 ccw(c218.263,19.748) 217.797,19.282 ; 217.887,30.674 220.198,30.674 220.754,30.119 220.754,28.646 220.754,26.628 220.455,26.329 220.455,23.911 220.658,23.708 220.658,21.603 218.737,19.682 218.677,19.682 218.254,19.259 ; v1(218.651,21.731) 219.337,22.417 219.337,22.519 ; 218.711,16.711 cw(c218.711,16.309) 218.995,16.593 ; 218.885,46.405 cw(c219.319,45.971) 219.319,46.584 ; 218.967,16.711 217.991,16.711 ; 218.988,22.068 cw(c219.769,21.288) 219.769,22.392 ; 219.407,20.352 ccw(c218.84,20.919) 219.642,20.919 ; 219.446,46.711 cw(c220.722,46.711) 219.819,47.614 ; 219.54,23.377 ccw(c220.627,23.377) 219.859,22.609 ; 219.54,25.381 cw(c220.107,25.381) 219.706,25.782 ; 219.54,25.973 v1(219.54,24.652) 219.54,22.747 219.769,22.519 ; 219.769,21.046 ccw(c219.769,21.848) 220.336,21.281 ; 219.777,15.022 cw(c219.244,14.489) 219.997,14.489 ; 219.867,15.111 219.997,14.981 219.997,14.34 221.191,13.146 222.766,11.571 225.839,11.571 226.392,12.124 226.392,12.686 ; v1(220.251,19.725) 220.251,17.972 220.548,17.676 221.928,17.676 222.402,17.676 223.242,16.836 223.242,15.111 222.791,14.661 222.791,13.146 224.132,13.146 ; 220.469,13.868 ccw(c221.293,14.692) 221.293,13.527 ; v1(220.836,39.283) 220.836,40.502 219.413,41.924 v1(213.927,41.924) ; 221.42,13.4 ccw(c222.585,13.4) 221.761,12.576 ; 222.028,17.63 cw(c222.028,16.616) 222.745,17.333 ; 222.042,28.711 222.042,33.011 ; 222.791,13.717 cw(c224.636,13.717) 223.331,15.022 ; 222.791,13.952 ccw(c223.445,13.952) 222.983,13.49 ccw(c223.813,14.32) 223.813,13.146 ; 222.791,14.474 cw(c223.304,14.474) 223.254,14.985 ; 222.911,14.163 ccw(c223.801,13.925) 223.003,13.464 ; v1(222.995,31.561) 224.166,31.561 224.192,31.536 ; 223.612,13.146 cw(c223.612,11.807) 224.559,12.754 ; 224.192,28.711 224.192,31.536 ; 224.192,33.011 224.192,31.536 ; 224.217,47.361 222.846,48.732 220.937,48.732 219.192,46.986 219.192,46.711 218.215,45.734 v1(215.756,45.734) 213.927,43.906 v1(213.927,41.924) ; 224.546,12.781 ccw(c224.132,12.729) 224.132,13.146 ; 224.592,12.686 224.132,13.146 ; 225.986,11.718 ccw(c225.117,12.586) 226.346,12.586 ; 190.127,46.149 190.567,45.709 ; 190.457,17.667 189.238,16.448 189.238,14.086 190.508,12.816 190.864,12.816 ; 193.379,36.299 193.492,36.186 ; 217.82,19.259 218.254,19.259 ; 217.991,16.711 217.991,18.996 218.254,19.259 ; 185.935,12.945 ccw(c186.487,12.945) 186.096,12.554 cw(c186.487,12.945) 185.935,12.945 ; 192.842,32.816 cw(c193.171,32.625) 193.073,32.993 ccw(c193.171,32.625) 192.842,32.816
  Top Layer w1.27: 182.08,52.773 182.08,53.092 ; 195.867,39.207 195.867,40.137 197.267,41.536 ; 206.041,20.061 206.067,20.087 v1(207.628,20.087) 209.117,20.087 ; 220.651,16.321 221.801,16.321 ; 220.853,46.957 cw(c221.097,46.042) 221.767,46.711 222.342,46.136 222.342,44.311 ; 220.919,46.965 cw(c220.919,45.531) 221.933,46.545 ; 221.767,15.236 221.767,16.321 ; 221.767,46.501 cw(c223.177,46.501) 222.18,47.498 ; 221.901,16.321 ccw(c221.901,16.553) 222.065,16.389
  Top Layer w2.54: 182.08,53.092 183.585,51.586 187.183,51.586 187.962,50.807 ; 183.667,6.511 185.034,7.878 185.034,10.028 185.482,10.476 ; 223.868,50.297 225.707,52.136 229.242,52.136 230.492,53.386 ; 225.992,9.786 226.85,8.928 227.409,8.928 228.492,10.011 230.992,7.511
  Bottom Layer w0.178: v1(197.849,22.519) 198.009,22.679 199.762,22.679 201.684,24.602 201.684,29.301 201.265,29.72 201.265,31.827 202.251,32.813 210.505,32.813 211.666,33.974 v1(211.666,34.025) ; v1@197.854,22.513 cw(c198.257,22.111) 198.257,22.679 ; v1@197.98,22.387 cw(c198.686,21.682) 198.686,22.679 ; v1(198.306,23.332) 199.881,23.332 201.354,24.805 201.354,29.148 200.935,29.567 200.935,31.964 202.119,33.149 209.774,33.149 v5(210.726,34.101) ; v1@198.437,23.2 cw(c198.755,22.882) 198.755,23.332 cw(c198.755,23.781) v1@198.437,23.463 ; v5@210.513,34.101 cw(c209.997,34.101) 210.362,33.737 cw(c210.726,33.372) v5@210.726,33.888 ; 211.313,33.621 ccw(c210.908,34.025) v1@211.48,34.025 ; 211.435,33.743 cw(c211.666,33.512) v1@211.666,33.839 ; 219.87,36.647 cw(c220.753,36.647) v1@220.129,37.272 ; 219.87,37.077 cw(c220.324,37.077) v1@220.003,37.397 ; v1@219.87,37.403 219.87,34.939 221.979,32.831 222.944,32.831 223.706,32.069 223.706,30.139 220.761,27.194 220.761,21.427 221.318,20.869 v1(221.318,20.055) ; v1@221.187,20.187 ccw(c220.869,20.504) 221.318,20.504 ccw(c221.767,20.504) v1@221.45,20.187
  Bottom Layer w0.25: v1(102.382,45.255) 107.564,45.255 109.19,43.629 110.576,43.629 ; v1@102.488,45.149 cw(c102.745,44.892) 102.745,45.255 cw(c102.745,45.617) v1@102.488,45.361 ; 111.717,43.058 111.717,45.499 ; 209.776,39.816 214.039,35.553 214.039,29.945 214.471,29.513 214.471,29.032 214.967,28.536 v1(214.967,28.361) ; v1(209.792,21.736) 209.817,21.711 210.867,21.711 213.617,24.461 213.617,25.936 214.392,26.711 214.917,26.711 v1(214.967,26.761) ; v1@209.898,21.63 cw(c210.093,21.435) 210.093,21.711 ; v1@209.898,21.842 ccw(c210.214,22.159) 210.214,21.711 ; 210.917,39.245 214.442,35.72 214.442,30.111 215.642,28.911 215.642,26.211 v1(214.292,24.861) ; 210.917,41.686 213.492,44.261 v1(217.892,44.261) ; v1@214.292,25.011 ccw(c214.292,25.374) 214.548,25.117 ccw(c214.804,24.861) v1@214.442,24.861 ; 214.484,26.711 ccw(c214.484,27.244) v1@214.861,26.867 ; 214.587,28.916 cw(c214.032,28.361) v1@214.817,28.361 ; v1@217.786,44.155 ccw(c217.529,43.899) 217.529,44.261 ccw(c217.529,44.624) v1@217.786,44.367